# Altium PCB StepMotor_pcb.PcbDoc
Units mm, origin at the board's own origin, x right, y up, seen from the top; angles counter-clockwise.
Board outline 118.92 x 65.15 mm, 2 copper layers (Top Layer, Bottom Layer); 46 components, 63 nets, 216 pads, 14 vias.
Unrouted connection lines stored in the file: 2.
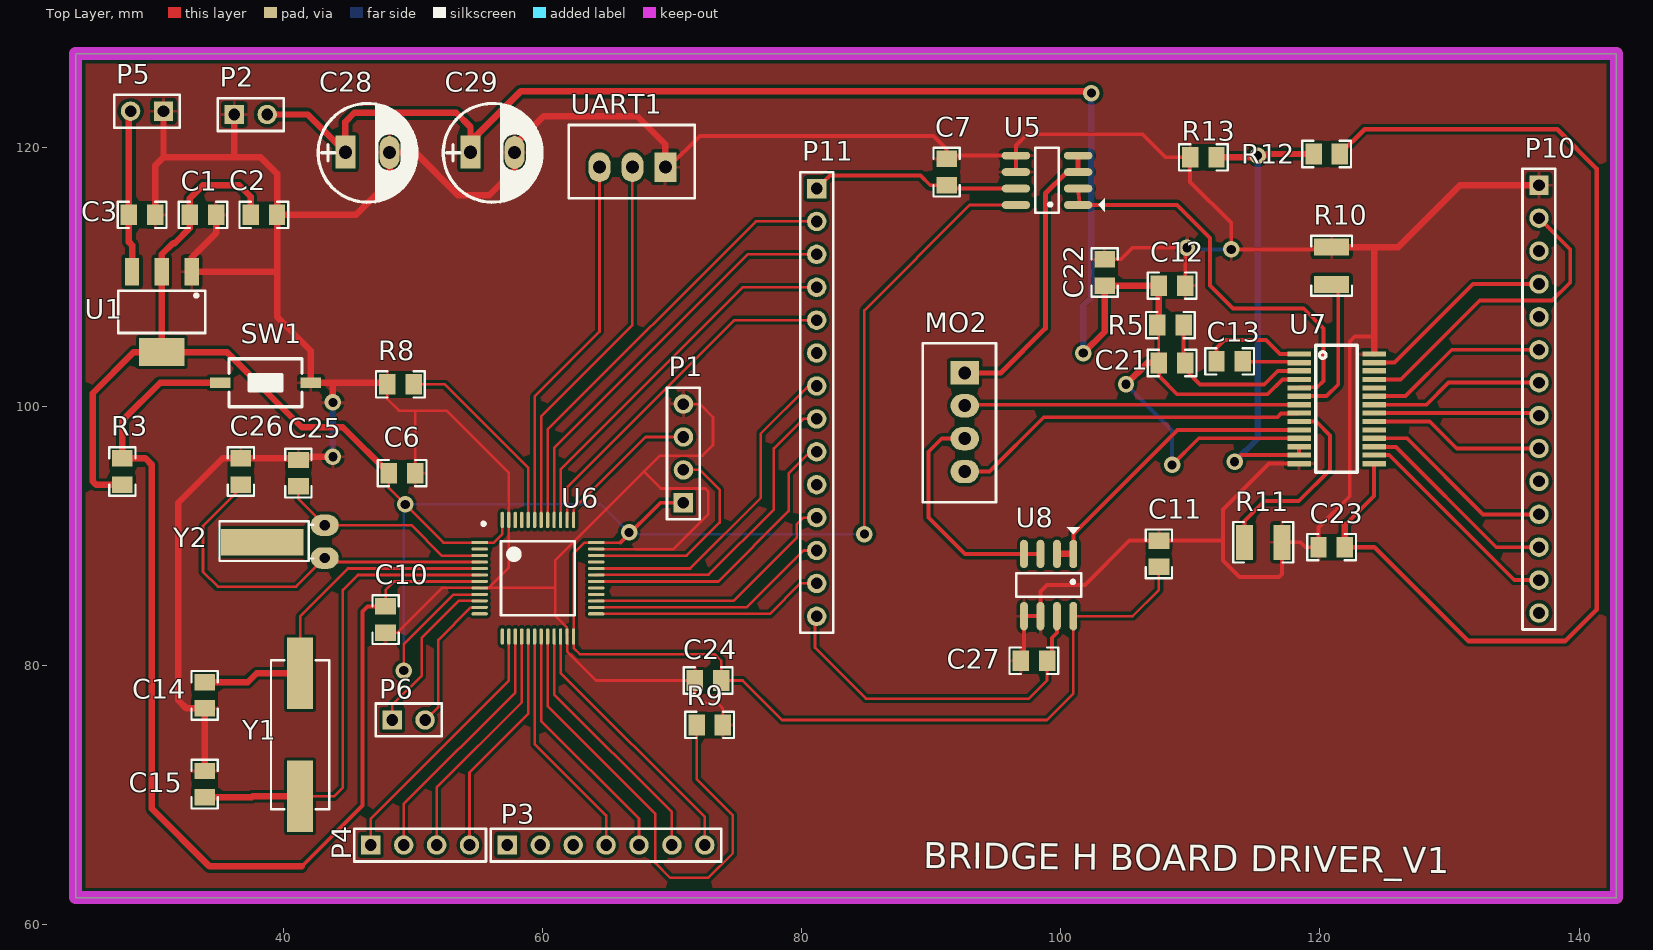
[diagram p0: Top Layer view]
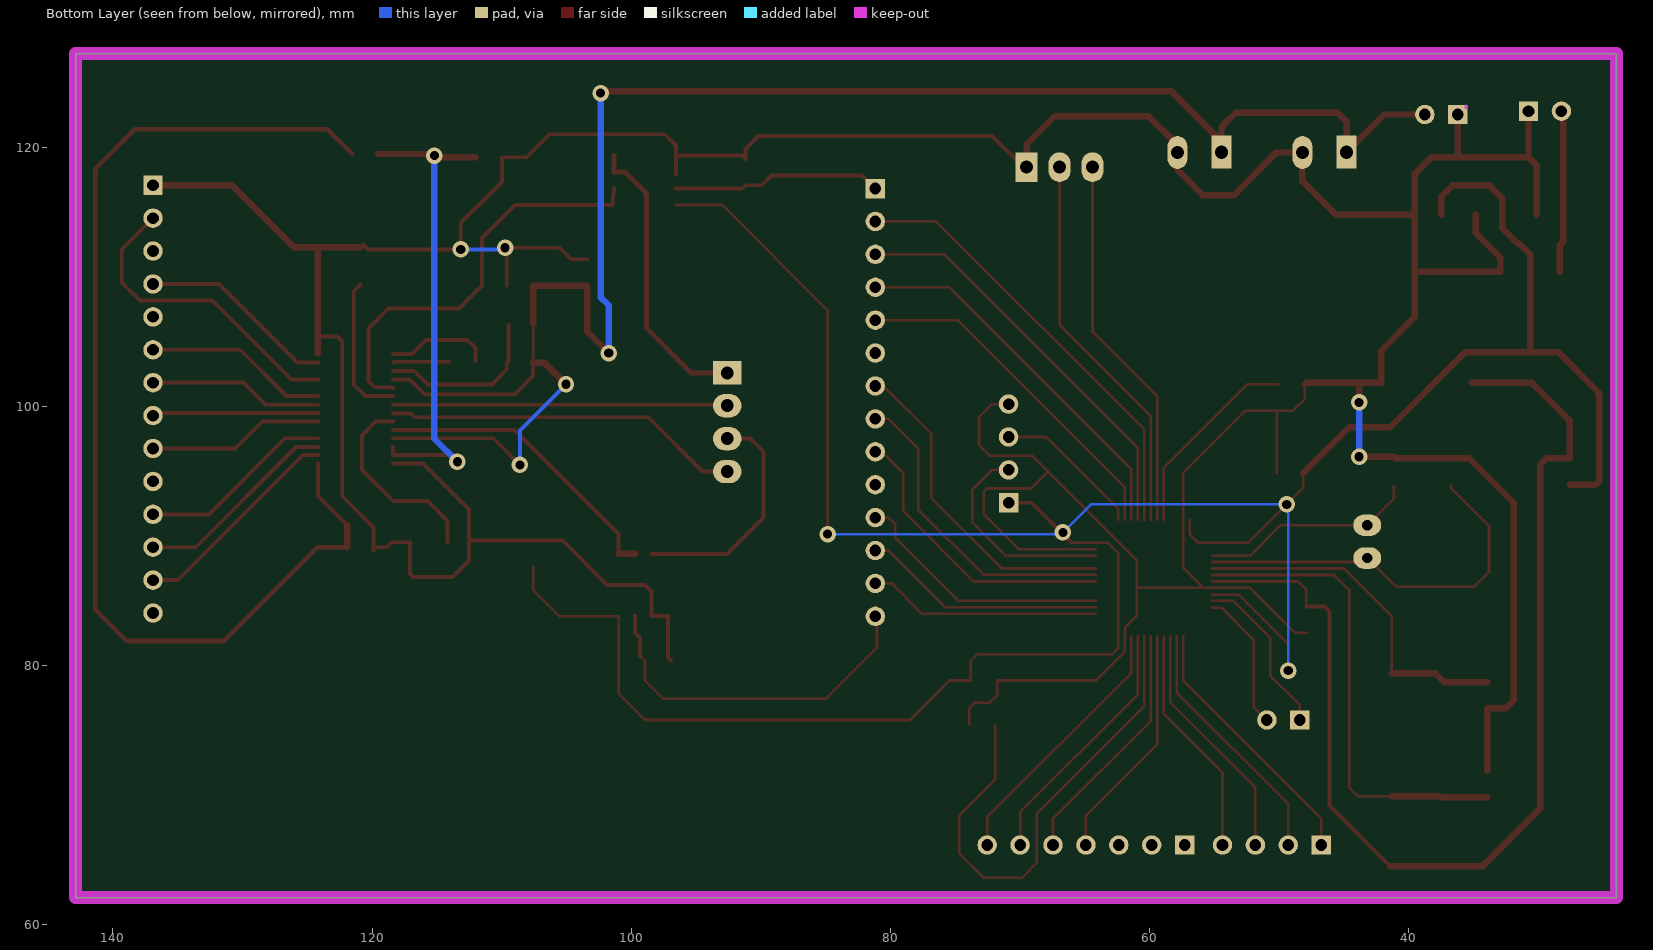
[diagram p1: Bottom Layer view, seen from below]

## Layer stack, top to bottom
Top Solder: solder mask 0.0102, Solder Resist, Dk 3.5
Top Layer: signal copper 0.0356
Dielectric1: dielectric 0.32, FR-4, Dk 4.8
Bottom Layer: signal copper 0.0356
Bottom Solder: solder mask 0.0102, Solder Resist, Dk 3.5

## Board outline
23.957,62.103 23.957,127.249 142.875,127.249 142.875,62.103

## Design rules (kind name [scope] priority, off if disabled: settings)
Clearance [All] p1: gap=0.254 ignorepadtopadclearanceinfootprint=FALSE except(0: Arc-Hole Track-Hole SMDPad-Hole THPad-Hole Via-Hole Fill-Hole Poly-Hole Region-Hole Text-Hole)
PolygonConnect [All] p1: connectstyle=Relief reliefconductorwidth=0.254 reliefentries=4 polygonreliefangle="90 Angle" airgapwidth=0.254
RoutingVias [All] p1: holewidth=0.711 width=1.27 viastyle="Through Hole" minholewidth=0.711 minwidth=1.27 maxholewidth=0.711 maxwidth=1.27
SolderMaskExpansion [All] p1: expansion=0.102
Width [All] p1: maxlimit=0.7 minlimit=0.2 preferedwidth=0.5
30 further rules are at their usual default settings.

## Components (designator, comment, footprint, x,y, rotation, side; value= is the part's Value field where it differs from the comment)
C1 "105" 0805_HV 33.782,114.808 r180 top value=103
C2 "105" 0805_HV 38.481,114.808 r180 top value=103
C3 "105" 0805_HV 29.083,114.808 r180 top value=103
C6 "104" 0805_HV 49.149,94.869 r180 top
C7 "104" 0805_HV 91.186,118.11 r270 top
C10 "104" 0805_HV 47.879,83.566 r90 top
C11 "104" 0805_HV 107.569,88.646 r270 top
C12 "103" 0805_HV 108.585,109.347 r180 top
C13 "103" 0805_HV 113.03,103.505 r180 top
C14 "22p" 0805_HV 33.909,77.724 r90 top value=103
C15 "22p" 0805_HV 33.909,70.866 r270 top value=103
C21 "0.1uF" 0805_HV 108.585,103.378 r180 top
C22 "103" 0805_HV 103.378,110.363 r270 top
C23 "0.47uF" 0805_HV 120.904,89.154 r0 top
C24 "104" 0805_HV 72.771,78.867 r0 top
C25 "12p" 0805_HV 41.148,94.869 r270 top value=103
C26 "12p" 0805_HV 36.703,94.996 r270 top value=103
C27 "104" 0805_HV 97.917,80.391 r0 top
C28 "390uF" CP1/3.0 46.482,119.634 r0 top
C29 "390uF" CP1/3.0 56.134,119.634 r0 top
MO2 "Header 4_MH" "HEADER 4" 92.583,98.806 r270 top
P1 "PRO01" HDR1X4 70.866,92.583 r90 top
P2 "Power" HDR1X2 36.195,122.555 r0 top
P3 "GPIO" HDR1X7 57.277,66.167 r0 top
P4 "Encoder" HDR1X4 46.736,66.167 r0 top
P5 "Power" HDR1X2 30.734,122.809 r180 top
P6 "Power" HDR1X2 48.387,75.819 r0 top (schematic designator P2)
P10 "H1" HDR1X14 136.906,117.094 r270 top
P11 "MCU" HDR1X14 81.153,116.84 r270 top
R3 "10K" 0805_HV 27.559,94.996 r270 top
R5 "1M" 0805_HV 108.458,106.299 r180 top
R8 "100K" 0805_HV 49.022,101.727 r0 top
R9 "100K" 0805_HV 72.898,75.438 r0 top
R10 "RT0603DRE07140KL" 1210 120.904,110.871 r90 top value=140k
R11 "RT0603DRE07140KL" 1210 115.623,89.535 r0 top value=140k
R12 "50K" 0805_HV 120.523,119.507 r0 top
R13 "30K" 0805_HV 110.998,119.253 r0 top
SW1 "SW" "BUTTON SMD 2" 38.608,101.854 r180 top
U1 "AMS1117-3.3V SOT223 _MH" SOT223 30.607,107.315 r180 top
U5 "ACS722LLCTR-05AB-T" SO-8 98.933,117.475 r180 top
U6 "STM32F103C8T6 LQFP48 _MH" LQFP48 59.662,86.736 r0 top
U7 "DRV8841PWPR" TSSOP-28EP 121.285,99.835 r0 top
U8 "ACS722LLCTR-05AB-T" SO-8 99.06,86.233 r270 top
UART1 "Header 3_MH" "HEADER 3" 66.929,118.491 r180 top
Y1 "8MHZ" "XTAL 49S SMD" 41.275,74.676 r90 top
Y2 "32.768KHZ" XT32kn 43.18,90.856 r180 top

## Footprints (in the part's own frame and the unit in brackets; to place one, negate y for a bottom-side part, rotate by r counter-clockwise, add the part's x,y. Pads: shape width x height; smd on the part's side, far side on the other; paste and mask are expansions set on the pad)
0805_HV [mil] "0805 with 30mil clearance between pads"
  rect 50x63 smd: 1(-40,0) 2(40,0)
  silkscreen extent -74,-40 74,40, body extent -43,-29 43,29, height 57
1210 [mm] "1210 from SM-752 data"
  rect 1.3x2.7 smd: 1(1.45,0) 2(-1.45,0)
  silkscreen extent -2.32,-1.57 2.32,1.57, body extent -1.7,-1.35 1.7,1.35, height 1.35
"BUTTON SMD 2" [mm]
  rect 1.6x0.8 smd: 1(-3.5,0) 2(3.5,0)
  silkscreen extent -2.82,-1.85 2.82,1.85, body extent -3.05,-1.85 3.05,1.85, height 2.5
CP1/3.0 [mil]
  rect 60x100 hole 40: 1(-67,0.5)
  oval 60x100 hole 40: 2(67,-0.5)
  silkscreen extent -150,-151 150,148, body extent -156,-161 159,154, height 453
HDR1X2 [mm] "Connector; Header; 2 Position"
  rect 1.5x1.5 hole 0.9: 1(0,0)
  round 1.5 hole 0.9: 2(2.54,0)
  silkscreen extent -1.27,-1.27 3.81,1.27
HDR1X4 [mm] "Connector; Header; 4 Position"
  rect 1.5x1.5 hole 0.9: 1(0,0)
  round 1.5 hole 0.9: 2(2.54,0) 3(5.08,0) 4(7.62,0)
  silkscreen extent -1.27,-1.27 8.89,1.27
HDR1X7 [mm] "Connector; Header; 7 Position"
  rect 1.5x1.5 hole 0.9: 1(0,0)
  round 1.5 hole 0.9: 2(2.54,0) 3(5.08,0) 4(7.62,0) 5(10.16,0) 6(12.7,0) 7(15.24,0)
  silkscreen extent -1.27,-1.27 16.51,1.27
HDR1X14 [mm] "Connector; Header; 14 Position"
  rect 1.5x1.5 hole 0.9: 1(0,0)
  round 1.5 hole 0.9: 2(2.54,0) 3(5.08,0) 4(7.62,0) 5(10.16,0) 6(12.7,0) 7(15.24,0) 8(17.78,0) 9(20.32,0) 10(22.86,0) 11(25.4,0) 12(27.94,0) 13(30.48,0) 14(33.02,0)
  silkscreen extent -1.27,-1.27 34.29,1.27
"HEADER 3" [mm]
  rect 1.7x2.3 hole 1 paste+0: 1(-2.54,0)
  oval 1.7x2.3 hole 1 paste+0: 2(0,0) 3(2.54,0)
  silkscreen extent -4.83,-3.25 4.9,2.41
"HEADER 4" [mm]
  rect 1.8x2.2 hole 1: 1(-3.81,0)
  oval 1.8x2.2 hole 1: 2(-1.27,0) 3(1.27,0) 4(3.81,0)
  silkscreen extent -6.1,-3.25 6.17,2.41
LQFP48 [mm]
  rect 1.27x0.25 smd: 1(-4.524,2.775)
  oval 1.27x0.25 smd: 2(-4.524,2.275) 3(-4.524,1.775) 4(-4.524,1.275) 5(-4.524,0.775) 6(-4.524,0.275) 7(-4.524,-0.225) 8(-4.524,-0.725) 9(-4.524,-1.225) 10(-4.524,-1.725) 11(-4.524,-2.225) 12(-4.524,-2.725) 25(4.473,-2.725) 26(4.473,-2.225) 27(4.473,-1.725) 28(4.473,-1.225) 29(4.473,-0.725) 30(4.473,-0.225) 31(4.473,0.275) 32(4.473,0.775) 33(4.473,1.275) 34(4.473,1.775) 35(4.473,2.275) 36(4.473,2.775)
  oval 0.25x1.27 smd: 13(-2.775,-4.473) 14(-2.275,-4.473) 15(-1.775,-4.473) 16(-1.275,-4.473) 17(-0.775,-4.473) 18(-0.275,-4.473) 19(0.225,-4.473) 20(0.725,-4.473) 21(1.225,-4.473) 22(1.725,-4.473) 23(2.225,-4.473) 24(2.725,-4.473) 37(2.725,4.524) 38(2.225,4.524) 39(1.725,4.524) 40(1.225,4.524) 41(0.725,4.524) 42(0.225,4.524) 43(-0.275,4.524) 44(-0.775,4.524) 45(-1.275,4.524) 46(-1.775,4.524) 47(-2.275,4.524) 48(-2.775,4.524)
  silkscreen extent -4.35,-2.82 2.82,4.35, body extent -4.53,-4.47 4.47,4.53, height 1.5
SO-8 [mm] "8-Pin Small Outline Integrated Circuit 1.27 mm Pitch, IPC Medium Density"
  oval 2.2x0.6 smd: 1(-2.4,1.905) 2(-2.4,0.635) 3(-2.4,-0.635) 4(-2.4,-1.905) 5(2.4,-1.905) 6(2.4,-0.635) 7(2.4,0.635) 8(2.4,1.905)
  silkscreen extent -4.44,-2.5 0.9,2.5, body extent -2.93,-2.51 3.08,2.49, height 1.75
SOT223 [mm] "SOT-223/SC-73; 4 Leads; Body 6.7 x 7.3 mm, inc. leads (LxW max)"
  rect 1.1x2.15 smd: 1(-2.3,-3.1) 2(0,-3.1) 3(2.3,-3.1)
  rect 3.5x2.15 smd: 4(0,3.1)
  silkscreen extent -3.35,-1.62 3.35,1.62, body extent -3.43,-1.65 3.43,1.65, height 2.54
TSSOP-28EP [mil]
  rect 71x16 smd: 1(-114,166.5) 2(-114,140.5) 3(-114,115.5) 4(-114,89.5) 5(-114,63.5) 6(-114,38.5) 7(-114,12.5) 8(-114,-12.5) 9(-114,-38.5) 10(-114,-64.5) 11(-114,-89.5) 12(-114,-115.5) 13(-114,-140.5) 14(-114,-166.5) 15(114,-166.5) 16(114,-140.5) 17(114,-115.5) 18(114,-89.5) 19(114,-64.5) 20(114,-38.5) 21(114,-12.5) 22(114,12.5) 23(114,38.5) 24(114,63.5) 25(114,89.5) 26(114,115.5) 27(114,140.5) 28(114,166.5)
  rect 0x0 smd: 29(0,-0.5)
  silkscreen extent -63,-193 63,194, body extent -126,-191 126,191, height 46
XT32kn [mil] "Crystal for 32,768kHz, 2pin"
  oval 85x65 hole 31: 1(0,0) 2(0,100)
  rect 250x80 smd: 3(190,52)
  silkscreen extent 34,-12 320,109, body extent -7,-5 343,107, height 79
"XTAL 49S SMD" [mm]
  rect 5.5x2 smd: 1(-4.75,0) 2(4.75,0)
  silkscreen extent -5.75,-2.25 5.75,2.25, body extent -6.15,-2.35 6.15,2.35, height 4.31

## Part data
C1 C2 C3 C14 C15 C25 C26: library part CM, "Cap SMD"
C6 C7 C10 C11 C12 C13 C21 C22 C23 C24 C27: library part "Capacitor 0805", "Ceramic Chip Capacitor - Standard", PackageDocument=Mar-2001, Code_IPC=2012[0805], Code_JEITA=0805, ComponentLink1Description="Manufacturer Link", ComponentLink1URL=http://www.kemet.com/, ComponentLink2Description=Datasheet, ComponentLink2URL=http://www.kemet.com/kemet/web/homepage/kechome.nsf/vapubfilesname/F3102TA.pdf/$file/F3102TA.pdf, DatasheetDocument=Mar-2001, LatestRevisionDate=19-Mar-2004, LatestRevisionNote="Silkscreen size reduced.", Note="Footprint corresponds to dimensions for bulk cassette packaging. This case size has tightened tolerances.", PackageReference=0805, Published=17-Jul-2002, Publisher="Altium Limited"
C28 C29: library part "Capacitor TuHoa", Cap_Case=10x22, Manufacturer=Nichicon, PartNumber=UHW1H391MPD6, Supplier Part Number 1=493-6885-ND, Tolerance_%=20, Value1=Unknown, Value2=50V, AEC Category=Q200, AEC Grade=N/A, AEC Qualified=N, Cap_F=0.000390, ComponentLink1Description="Datasheet link", ComponentLink1URL=http://nichicon-us.com/english/products/pdfs/e-uhw.pdf, CompType=Capacitor, LatestRevisionDate=2015-12-17, MountType=TH, PackageReference=10x22, Polarized=Y, Publisher="Texas Instruments", RoHS=Y, Series=ZL, Supplier 1=Digi-Key, SymbolVersion=2008-07-09, TaMax_C=105, TaMin_C=-40, Technology=AL, U/M=EA, ValueDisplayed=390uF, VDC_V=50
MO2: "Header 4P XH2.54 th?ng"
P1 P4: library part "Header 4", "Header, 4-Pin", LatestRevisionDate=17-Jul-2002, LatestRevisionNote="Re-released for DXP Platform.", Publisher="Altium Limited"
P2 P5 P6: library part "Header 2", "Header, 2-Pin", LatestRevisionDate=17-Jul-2002, LatestRevisionNote="Re-released for DXP Platform.", Publisher="Altium Limited"
P3: library part "Header 7H", "Header, 7-Pin, Right Angle", LatestRevisionDate=17-Jul-2002, LatestRevisionNote="Re-released for DXP Platform.", Publisher="Altium Limited"
P10 P11: library part "Header 14", "Header, 14-Pin", LatestRevisionDate=17-Jul-2002, LatestRevisionNote="Re-released for DXP Platform.", Publisher="Altium Limited"
R3 R5 R8 R9 R12 R13: library part "R nho", "RES, 100, 1%, 0.1 W, 0402", Manufacturer=Panasonic, PartNumber=ERJ-2RKF1000X, Power_W=0.1, Supplier Part Number 1=P100LCT-ND, TempCo="100 ppm/C", Tolerance_%=1, Value1=1%, Value2=0.1W, Value_Code=100R, AEC Category=Q200, AEC Qualified=?, ComponentLink1Description="Datasheet link", ComponentLink1URL=http://industrial.panasonic.com/www-data/pdf/AOA0000/AOA0000CE2.pdf, CompType=Resistor, EIA_Code=E96, LatestRevisionDate=2016-01-08, MountType=SMT, PackageReference=0402, Published=2008-06-26, Publisher="Texas Instruments", Res_ohm=100, RoHS=Y, Supplier 1=Digi-Key, Supplier 2=Mouser, Supplier 3=Farnell, Supplier Part Number 2=667-ERJ-2RKF1000X, Supplier Part Number 3=2304034, SymbolVersion=2009-05-29, Technology="Thick Film", U/M=EA, VDC_V=50
R10 R11: "RES, 140 k, 0.5%, 0.1 W, 0603", Manufacturer="Yageo America", Power_W=0.1, TempCo="50 ppm/C", Tolerance_%=0.5, Value1=0.5%, Value2=0.1W, Value_Code=140k, ValueDisplayed=200mR, ComponentLink1Description="Datasheet link", ComponentLink1URL=http://www.yageo.com/pdf/PYu-RT_1-to-0.05_RoHS_L_3.pdf, CompType=Resistor, EIA_Code=E192, LatestRevisionDate=2014-09-19, MountType=SMT, PackageReference=0603, PartNumber=RT0603DRE07140KL, Published=2008-06-26, Publisher="Texas Instruments", Res_ohm=140000, RoHS=Y, SymbolVersion=2009-05-29, Technology="Thin Film", U/M=EA, VDC_V=75
SW1: library part "BUTTON 2P SMD_MH", "Nút nh?n 2 chân, dán"
U5 U8: library part ACS712
U7: BOM_LCSC Assembly=Yes, BOM_Manufacturer=TI, BOM_Manufacturer Part=DRV8841PWPR, BOM_Supplier=LCSC, BOM_Supplier Part=C36542, image=//image.lceda.cn/szlcsc/C36542.jpg, SMT Type=Extend, spicePre=U
UART1: "Header 3P XH2.54 th?ng"
Y1 Y2: library part "CRYSTAL_49S DIP_MH", "Crystal Oscillator", LatestRevisionDate=17-Jul-2002, LatestRevisionNote="Re-released for DXP Platform.", PackageReference=R38, Published=8-Jun-2000, Publisher="Altium Limited"

## Via types
v1: diameter 1.27, hole 0.711, Top Layer to Bottom Layer, 14 vias

## Nets (pads, with @x,y where several pads share a name; then routed paths per layer and width w, separated by ;. In a path a pad name is that pad's centre, name@x,y a point inside that pad or via, vN(x,y) a via of type N, cw(c..) or ccw(c..) an arc to the next point about the centre after c; other vN are vias at no path point)
5V: C3.2 P5.2 U1.3 | length 12.5
  Top Layer w0.5: P5.2@28.067,122.809 C3.2 28.067,112.711 28.307,112.471 U1.3
AI0: P11.2 U6.41 | length 34.4
  Top Layer w0.2: U6.41 60.387,92.23 60.387,98.233 76.454,114.3 P11.2
AI0a: U7.24
AI1: P11.3 U6.40 | length 32
  Top Layer w0.2: U6.40 60.887,96.828 75.819,111.76 P11.3
AI1a: P10.2 U7.25 | length 24.2
  Top Layer w0.3: U7.25 126.238,102.108 132.334,108.204 137.922,108.204 139.319,109.601 139.319,112.141 P10.2
AI2a: P10.3
BI1: P11.4 U6.39 | length 29.5
  Top Layer w0.2: U6.39 61.387,95.169 75.438,109.22 P11.4
BI1a: U7.26
BI2: P11.5 U6.38 | length 27.1
  Top Layer w0.2: U6.38 61.887,93.764 74.803,106.68 P11.5
BI2a: P10.4 U7.27 | length 15.2
  Top Layer w0.3: U7.27 125.755,103.403 131.826,109.474 P10.4
BI3a: P10.5
BOOT0: R8.2 U6.44 | length 15.5
  Top Layer w0.2: R8.2 52.451,101.727 58.887,95.291 U6.44
BOOT1: R9.1 U6.20 | length 39.2
  Top Layer w0.2: U6.20 60.387,76.9 68.707,68.58 68.707,64.77 69.85,63.627 72.771,63.627 74.676,65.532 74.676,68.453 71.882,71.247 R9.1
CLK: P4.2 U6.15 | length 19.7
  Top Layer w0.2: P4.2 49.276,69.342 57.887,77.953 U6.15
CSN: P4.1 U6.14 | length 20.5
  Top Layer w0.2: P4.1 46.736,68.199 57.387,78.85 U6.14
GND: C1.1 C2.1 C3.1 C6.1 C7.1 C10.1 C11.1 C12.1 C14.1 C15.1 C22.1 C23.1 C24.1 C25.1 C26.1 C27.1 C28.2 C29.2 P1.4 P2.1 P5.1 P10.1 R8.1 R9.2 R10.1 R11.1 R13.1 SW1.1 U1.1 U5.5 U5.6 U6.8 U6.23 U6.35 U6.47 U7.14 U7.28 U8.5 U8.6 UART1.1 | length 407
  Top Layer w0.2: C10.1 48.768,82.55 52.229,86.011 U6.8 55.159,86.032 55.847,86.032 ; R8.1 48.006,100.584 48.895,99.695 50.165,99.695 ; C6.1 50.165,99.695 ; U6.23 61.887,81.115 64.135,78.867 C24.1 71.755,77.724 72.326,77.153 73.469,77.153 73.914,76.708 R9.2 ; U6.23@61.908,82.767 61.908,82.496 61.866,82.454 61.866,82.971 60.925,83.912 60.96,83.947 60.96,86.106 ; U6.35 64.139,89.007 70.084,89.007 72.771,91.694 72.771,93.472 72.556,93.687 69.127,93.687 67.818,94.996 ; P1.4 72.136,100.203 73.152,99.187 73.152,97.028 72.351,96.227 69.049,96.227 67.818,94.996 ; 50.165,99.695 52.578,99.695 57.387,94.886 U6.47 57.387,87.572 55.847,86.032 ; 55.847,86.032 60.886,86.032 60.96,86.106 ; 60.96,86.106 60.96,88.138 67.818,94.996
  Top Layer w0.3: UART1.1 69.723,118.491 72.136,120.904 90.17,120.904 91.186,119.888 C7.1 91.44,119.38 U5.5 ; U5.6@96.533,117.97 U5.6 U5.5 ; C27.1 97.155,80.645 U8.5 U8.6 98.425,85.725 98.933,86.233 101.854,86.233 105.283,89.662 C11.1 112.522,89.662 ; C22.1 104.648,111.379 105.537,112.268 v1(109.728,112.268) 109.601,112.141 C12.1 ; U7.14 116.053,95.606 112.522,92.075 112.522,89.662 ; C23.1@119.888,88.9 C23.1 ; R10.1 120.703,112.522 120.322,112.141 v1(113.157,112.141) 113.157,114.173 109.982,117.348 R13.1 108.077,119.253 106.299,121.031 97.409,121.031 96.533,120.155 U5.5 ; 124.181,105.41 122.682,105.41 122.301,105.029 122.301,93.091 119.888,90.678 C23.1 ; 112.522,89.662 112.522,88.138 113.792,86.868 116.84,86.868 117.073,87.101 R11.1 118.491,89.535 118.872,89.154 C23.1
  Top Layer w0.5: C3.1 30.099,118.618 30.734,119.253 ; P5.1 30.734,119.253 ; C15.1 C14.1 32.512,76.708 31.877,77.343 31.877,92.583 35.306,96.012 C26.1 41.021,96.012 41.148,96.139 v1(43.815,96.139) ; C1.1 34.798,113.411 32.907,111.52 U1.1 39.445,110.415 39.497,110.363 ; P2.1 36.195,119.253 ; v1(43.815,100.33) 43.815,101.854 ; R8.1 47.879,101.854 43.815,101.854 ; UART1.1 69.469,120.269 67.31,122.428 60.071,122.428 57.836,120.193 C29.2 57.836,118.288 55.88,116.332 53.467,116.332 50.178,119.621 C28.2 48.184,117.399 45.593,114.808 C2.1 ; R10.1 124.181,112.321 ; U7.28@124.181,104.111 124.181,112.321 ; P10.1 130.81,117.094 126.037,112.321 124.181,112.321 ; 30.734,119.253 36.195,119.253 ; 36.195,119.253 38.227,119.253 39.497,117.983 C2.1 ; 39.497,110.363 39.497,106.934 42.108,104.323 SW1.1 43.815,101.854 ; 39.497,110.363 C2.1
  Bottom Layer w0.3: v1(109.728,112.268) 109.474,112.268 109.601,112.141 v1(113.157,112.141)
  Bottom Layer w0.5: v1(43.815,96.139) v1(43.815,100.33)
IA: C7.2 P6.1 P11.1 U5.7 U6.10 | length 29.2
  Top Layer w0.2: P6.1 48.387,76.962 50.673,79.248 50.673,82.169 53.515,85.011 U6.10
  Top Layer w0.3: P11.1 82.169,117.856 89.154,117.856 89.916,117.094 C7.2 91.44,116.84 U5.7
IB: C27.2 P6.2 P11.14 U6.11 U8.7 | length 38.7
  Top Layer w0.2: P6.2 51.943,76.835 51.943,82.003 54.43,84.49 55.117,84.49 U6.11 ; P11.14@81.026,83.82 81.026,81.407 84.963,77.47 97.536,77.47 98.933,78.867 C27.2 C27.2@99.314,80.772
  Top Layer w0.3: C27.2@99.314,80.772 99.314,82.169 99.695,82.55 U8.7
MA+: MO2.1 U5.3 U5.4 | length 22.5
  Top Layer w0.381: MO2.1 95.377,102.616 98.806,106.045 98.806,116.459 100.457,118.11 U5.3 U5.4
MA-: MO2.2 U7.7 | length 25.8
  Top Layer w0.3: MO2.2@92.583,100.152 U7.7
MB+: MO2.3 U8.3 U8.4 | length 18.1
  Top Layer w0.3: MO2.3 90.805,97.536 89.789,96.52 89.789,91.44 92.596,88.633 U8.4 U8.3
MB-: MO2.4 U7.8 | length 27.7
  Top Layer w0.3: MO2.4 94.488,94.996 98.679,99.187 116.713,99.187 116.99,99.464 118.336,99.464 U7.8
MISO: P4.3 U6.16 | length 18.8
  Top Layer w0.2: P4.3 51.816,70.612 58.387,77.183 U6.16
MOSI: P4.4 U6.17 | length 18
  Top Layer w0.2: P4.4 54.356,71.755 58.887,76.286 U6.17
MOTOR_EN: P11.12 U6.26 | length 18.8
  Top Layer w0.2: U6.26 75.748,84.511 80.137,88.9 P11.12
MOTOR_ENa: P10.12 U7.17 | length 15.9
  Top Layer w0.3: U7.17 125.857,96.901 133.604,89.154 P10.12
MOTOR_RST: P11.13 U6.25 | length 18
  Top Layer w0.2: U6.25 77.534,84.011 79.883,86.36 P11.13
MOTOR_RSTa: P10.13 U7.16 | length 16.7
  Top Layer w0.3: U7.16 125.349,96.266 135.001,86.614 P10.13
NetC13_1: C13.1 U7.2 | length 4.4
  Top Layer w0.254: C13.1 114.046,103.48 118.313,103.48 U7.2
NetC13_2: C13.2 U7.1 | length 8.1
  Top Layer w0.3: C13.2 112.014,104.521 112.649,105.156 115.824,105.156 116.916,104.064 U7.1
NetC21_1: C21.1 R5.1 U7.3 | length 13.2
  Top Layer w0.3: R5.1 109.474,103.505 C21.1 109.601,102.87 110.744,101.727 115.697,101.727 116.738,102.768 U7.3
NetR10_2: R10.2 U7.6 | length 11.3
  Top Layer w0.3: U7.6 120.498,100.813 121.412,101.727 121.412,108.913 R10.2
NetR11_2: R11.2 U7.9 | length 15.4
  Top Layer w0.3: R11.2 114.173,91.186 115.697,92.71 118.364,92.71 120.777,95.123 120.777,97.79 119.71,98.857 U7.9
NetR12_1: R12.1 R13.2 U7.12 U7.13 | length 37.8
  Top Layer w0.3: v1(113.411,95.758) 113.919,96.266 U7.13 U7.12
  Top Layer w0.5: R13.2 115.621,119.253 115.875,119.507 R12.1
  Bottom Layer w0.5: v1(113.411,95.758) 115.189,97.536 v1(115.189,119.38)
NetU5_1: U5.1 U5.2 U7.5 | length 32.3
  Top Layer w0.3: U5.2 101.46,115.57 108.966,115.57 ; 109.029,115.506 111.506,113.03 111.506,109.347 113.284,107.569 118.745,107.569 120.269,106.045 120.269,101.981 119.789,101.501 118.443,101.501 U7.5
NetU7_10: U7.10 U8.1 U8.2 | length 23.6
  Top Layer w0.3: U8.1 100.965,90.17 108.991,98.196 U7.10
  Top Layer w0.5: U8.2 U8.1
NFAULT: P11.11 U6.27 | length 20.3
  Top Layer w0.2: U6.27 74.724,85.011 79.629,89.916 79.629,90.932 80.137,91.44 P11.11
nFAULTaa: P10.11 U7.18 | length 15.2
  Top Layer w0.3: U7.18 126.721,97.561 132.588,91.694 P10.11
OSCIN1: C14.2 U6.5 Y1.2 | length 27.4
  Top Layer w0.2: Y1.2 41.275,83.82 44.966,87.511 U6.5
  Top Layer w0.5: C14.2 37.236,78.74 37.922,79.426 Y1.2
OSCIN2: C25.2 U6.3 Y2.1 | length 16.8
  Top Layer w0.2: C25.2 41.148,92.888 Y2.1 49.86,90.856 52.205,88.511 U6.3
OSCOUT1: C15.2 U6.6 Y1.1 | length 37.3
  Top Layer w0.2: Y1.1 43.891,69.926 44.577,70.612 44.577,85.852 45.736,87.011 U6.6
  Top Layer w0.5: C15.2 37.541,69.85 37.617,69.926 Y1.1
OSCOUT2: C26.2 U6.4 Y2.2 | length 30.8
  Top Layer w0.2: C26.2 36.703,93.726 33.782,90.805 33.782,87.249 34.925,86.106 40.97,86.106 Y2.2 43.485,88.011 U6.4
PB0: P3.4 U6.18 | length 18.4
  Top Layer w0.2: U6.18 59.387,73.963 64.897,68.453 P3.4
PB1: P3.5 U6.19 | length 19.2
  Top Layer w0.2: U6.19 59.887,75.749 67.437,68.199 P3.5
PB10: P3.6 U6.21 | length 19.9
  Top Layer w0.2: U6.21 60.887,77.797 69.977,68.707 P3.6
PB11: P3.7 U6.22 | length 20.7
  Top Layer w0.2: U6.22 61.387,79.456 72.517,68.326 P3.7
PWM_CH1: U6.29
PWM_CH2: P11.9 U6.30 | length 22.9
  Top Layer w0.2: U6.30 73.557,86.511 78.994,91.948 78.994,94.862 80.652,96.52 P11.9
PWM_CH2a: P10.9 U7.20 | length 13.6
  Top Layer w0.3: U7.20 128.473,98.857 130.556,96.774 P10.9
PWM_CH3: P11.8 U6.31 | length 24.8
  Top Layer w0.2: U6.31 64.156,87.032 72.808,87.032 77.851,92.075 77.851,96.774 80.137,99.06 P11.8
PWM_CH3a: P10.8 U7.21 | length 12.8
  Top Layer w0.3: U7.21 136.703,99.517 P10.8
PWM_CH4: P11.7 U6.32 | length 25.8
  Top Layer w0.2: U6.32 71.382,87.511 76.835,92.964 76.835,97.917 80.518,101.6 P11.7
PWM_CH4a: P10.7 U7.22 | length 13.4
  Top Layer w0.3: U7.22 128.219,100.152 129.921,101.854 P10.7
PWM_CH5: P11.6
PWM_CH5a: P10.6 U7.23 | length 14.2
  Top Layer w0.3: U7.23 126.594,100.813 130.175,104.394 P10.6
RST: C10.2 R3.1 SW1.2 U6.7 | length 86.5
  Top Layer w0.2: C10.2 47.879,85.852 48.538,86.511 U6.7 U6.7@55.159,86.532
  Top Layer w0.3: 41.402,64.516 46.101,69.215 46.101,84.201 46.482,84.582 C10.2
  Top Layer w0.5: SW1.2 30.48,101.854 27.559,98.933 R3.1 29.337,96.012 29.845,95.504 29.845,68.961 34.29,64.516 41.402,64.516
RX: U6.43 UART1.3 | length 29.3
  Top Layer w0.2: U6.43@59.379,91.259 59.379,100.781 64.389,105.791 UART1.3
SWCLK: P1.3 U6.37 | length 11.6
  Top Layer w0.2: U6.37 62.387,92.105 67.945,97.663 P1.3
SWDIO: P1.2 U6.34 | length 16.5
  Top Layer w0.2: U6.34 71.112,88.511 73.66,91.059 73.66,93.599 72.136,95.123 P1.2
TX: U6.42 UART1.2 | length 30.2
  Top Layer w0.2: U6.42@59.883,91.259 59.883,99.253 66.929,106.299 UART1.2
V3P3OUT: C23.2 R12.2 U7.15 | length 86.7
  Top Layer w0.3: 121.92,90.856 124.181,93.116 U7.15
  Top Layer w0.35: R12.2 123.444,121.412 138.303,121.412 141.351,118.364 141.351,84.328 138.938,81.915 131.445,81.915 124.206,89.154 C23.2
  Top Layer w0.5: C23.2 121.92,90.856
VBAT: C1.2 C2.2 C6.2 C11.2 C24.2 P1.1 R3.2 U1.2 U1.4 U5.8 U6.1 U6.9 U6.24 U6.36 U6.48 U8.8 | length 237
  Top Layer w0.2: C6.2 48.133,93.726 v1(49.403,92.456) 52.348,89.511 U6.1 56.237,89.511 56.887,90.161 U6.48 ; v1(49.276,79.629) 49.276,81.661 53.105,85.49 55.117,85.49 U6.9 ; 66.016,89.511 U6.36 63.222,89.511 62.387,88.676 U6.24 62.387,81.377 62.865,80.899 73.279,80.899 73.787,80.391 C24.2 75.438,78.867 78.486,75.819 98.933,75.819 100.965,77.851 U8.8 105.55,83.833 107.569,85.852 C11.2 ; 84.836,90.932 v1(84.836,90.17) 84.836,107.442 92.964,115.57 U5.8
  Top Layer w0.3: 66.016,89.511 69.088,92.583 P1.1
  Top Layer w0.5: R3.2 25.527,93.98 25.273,94.234 25.273,101.04 28.448,104.215 U1.4 ; C2.2 37.465,116.205 36.576,117.094 33.782,117.094 32.766,116.078 C1.2 32.766,113.792 31.598,112.624 31.471,112.624 30.607,111.76 U1.2 U1.4 ; C6.2 44.577,98.425 41.402,98.425 35.612,104.215 U1.4
  Bottom Layer w0.2: v1(49.276,79.629) 49.276,92.329 v1(49.403,92.456) 64.516,92.456 v1(66.675,90.297) 66.802,90.17 v1(84.836,90.17)
VCC_MO: C12.2 C21.2 C22.2 C28.1 C29.1 P2.2 R5.2 U7.4 U7.11 | length 142.7
  Top Layer w0.2: R5.2 107.569,106.172 C21.2
  Top Layer w0.3: R5.2 R5.2@107.569,106.426 ; C21.2 107.569,102.362 108.966,100.965 115.951,100.965 117.094,102.108 U7.4 ; v1@108.585,95.758 v1(108.585,95.504) 110.642,97.561 U7.11
  Top Layer w0.5: P2.2 41.872,122.555 C28.1 44.78,121.996 45.466,122.682 53.34,122.682 54.432,121.59 C29.1@54.432,120.472 ; C29.1 C29.1@54.432,120.472 ; v1(101.727,104.14) 103.378,105.791 C22.2 C12.2 R5.2@107.569,106.426 ; v1@102.362,124.333 58.293,124.333 C29.1@54.432,120.472 ; v1(105.029,101.727) 106.68,103.378 C21.2
  Bottom Layer w0.3: v1(105.029,101.727) 108.585,98.171 v1(108.585,95.504)
  Bottom Layer w0.5: v1(101.727,104.14) 101.727,107.823 102.362,108.458 v1(102.362,124.206)
pads on no net: P3.1 P3.2 P3.3 P10.10 P10.14 P11.10 U6.2 U6.12 U6.13 U6.28 U6.33 U6.45 U6.46 U7.19 U7.29 Y2.3

## Polygon pours and split planes (outlines as drawn)
GND on Top Layer "Keep-Out Layer-No Net" (solid, pour order 2): 23.749,126.873 23.876,127 142.748,127 142.748,62.23 142.621,62.357 24.511,62.357 24.003,62.865 24.003,126.746

## Keep-outs
Bottom Layer:
  lines w0.254: 35.56,123.063 35.56,123.19
Keep-Out Layer:
  lines w1: 3.688,-92.629 62.523,-92.629 ; 15.626,-88.819 74.461,-88.819 ; 124.973,-70.023 183.808,-70.023 ; 23.957,62.103 23.957,127.249 142.875,127.249 142.875,62.103 23.957,62.103

## Silkscreen, mask and mechanical layers (free items; w line width, h text height)
Top Overlay:
  text "BRIDGE H BOARD DRIVER_V1" at 89.375,64.372 h2 r359.44